# Altium PCB PC110-itx.PcbDoc (part 7 of 16)
Units mm, origin at the board's own origin, x right, y up, seen from the top; angles counter-clockwise.
Board outline 170 x 170 mm, 16 copper layers (FC1, FC2, FC3, FC4, IP1, IC1, IC2, IP2, IP3, IC3, IC4, IP4, BC4, BC3, BC2, BC1), stack 3.903 mm thick; 935 components, 1357 nets, 4698 pads, 3240 vias.
Unrouted connection lines stored in the file: 552.
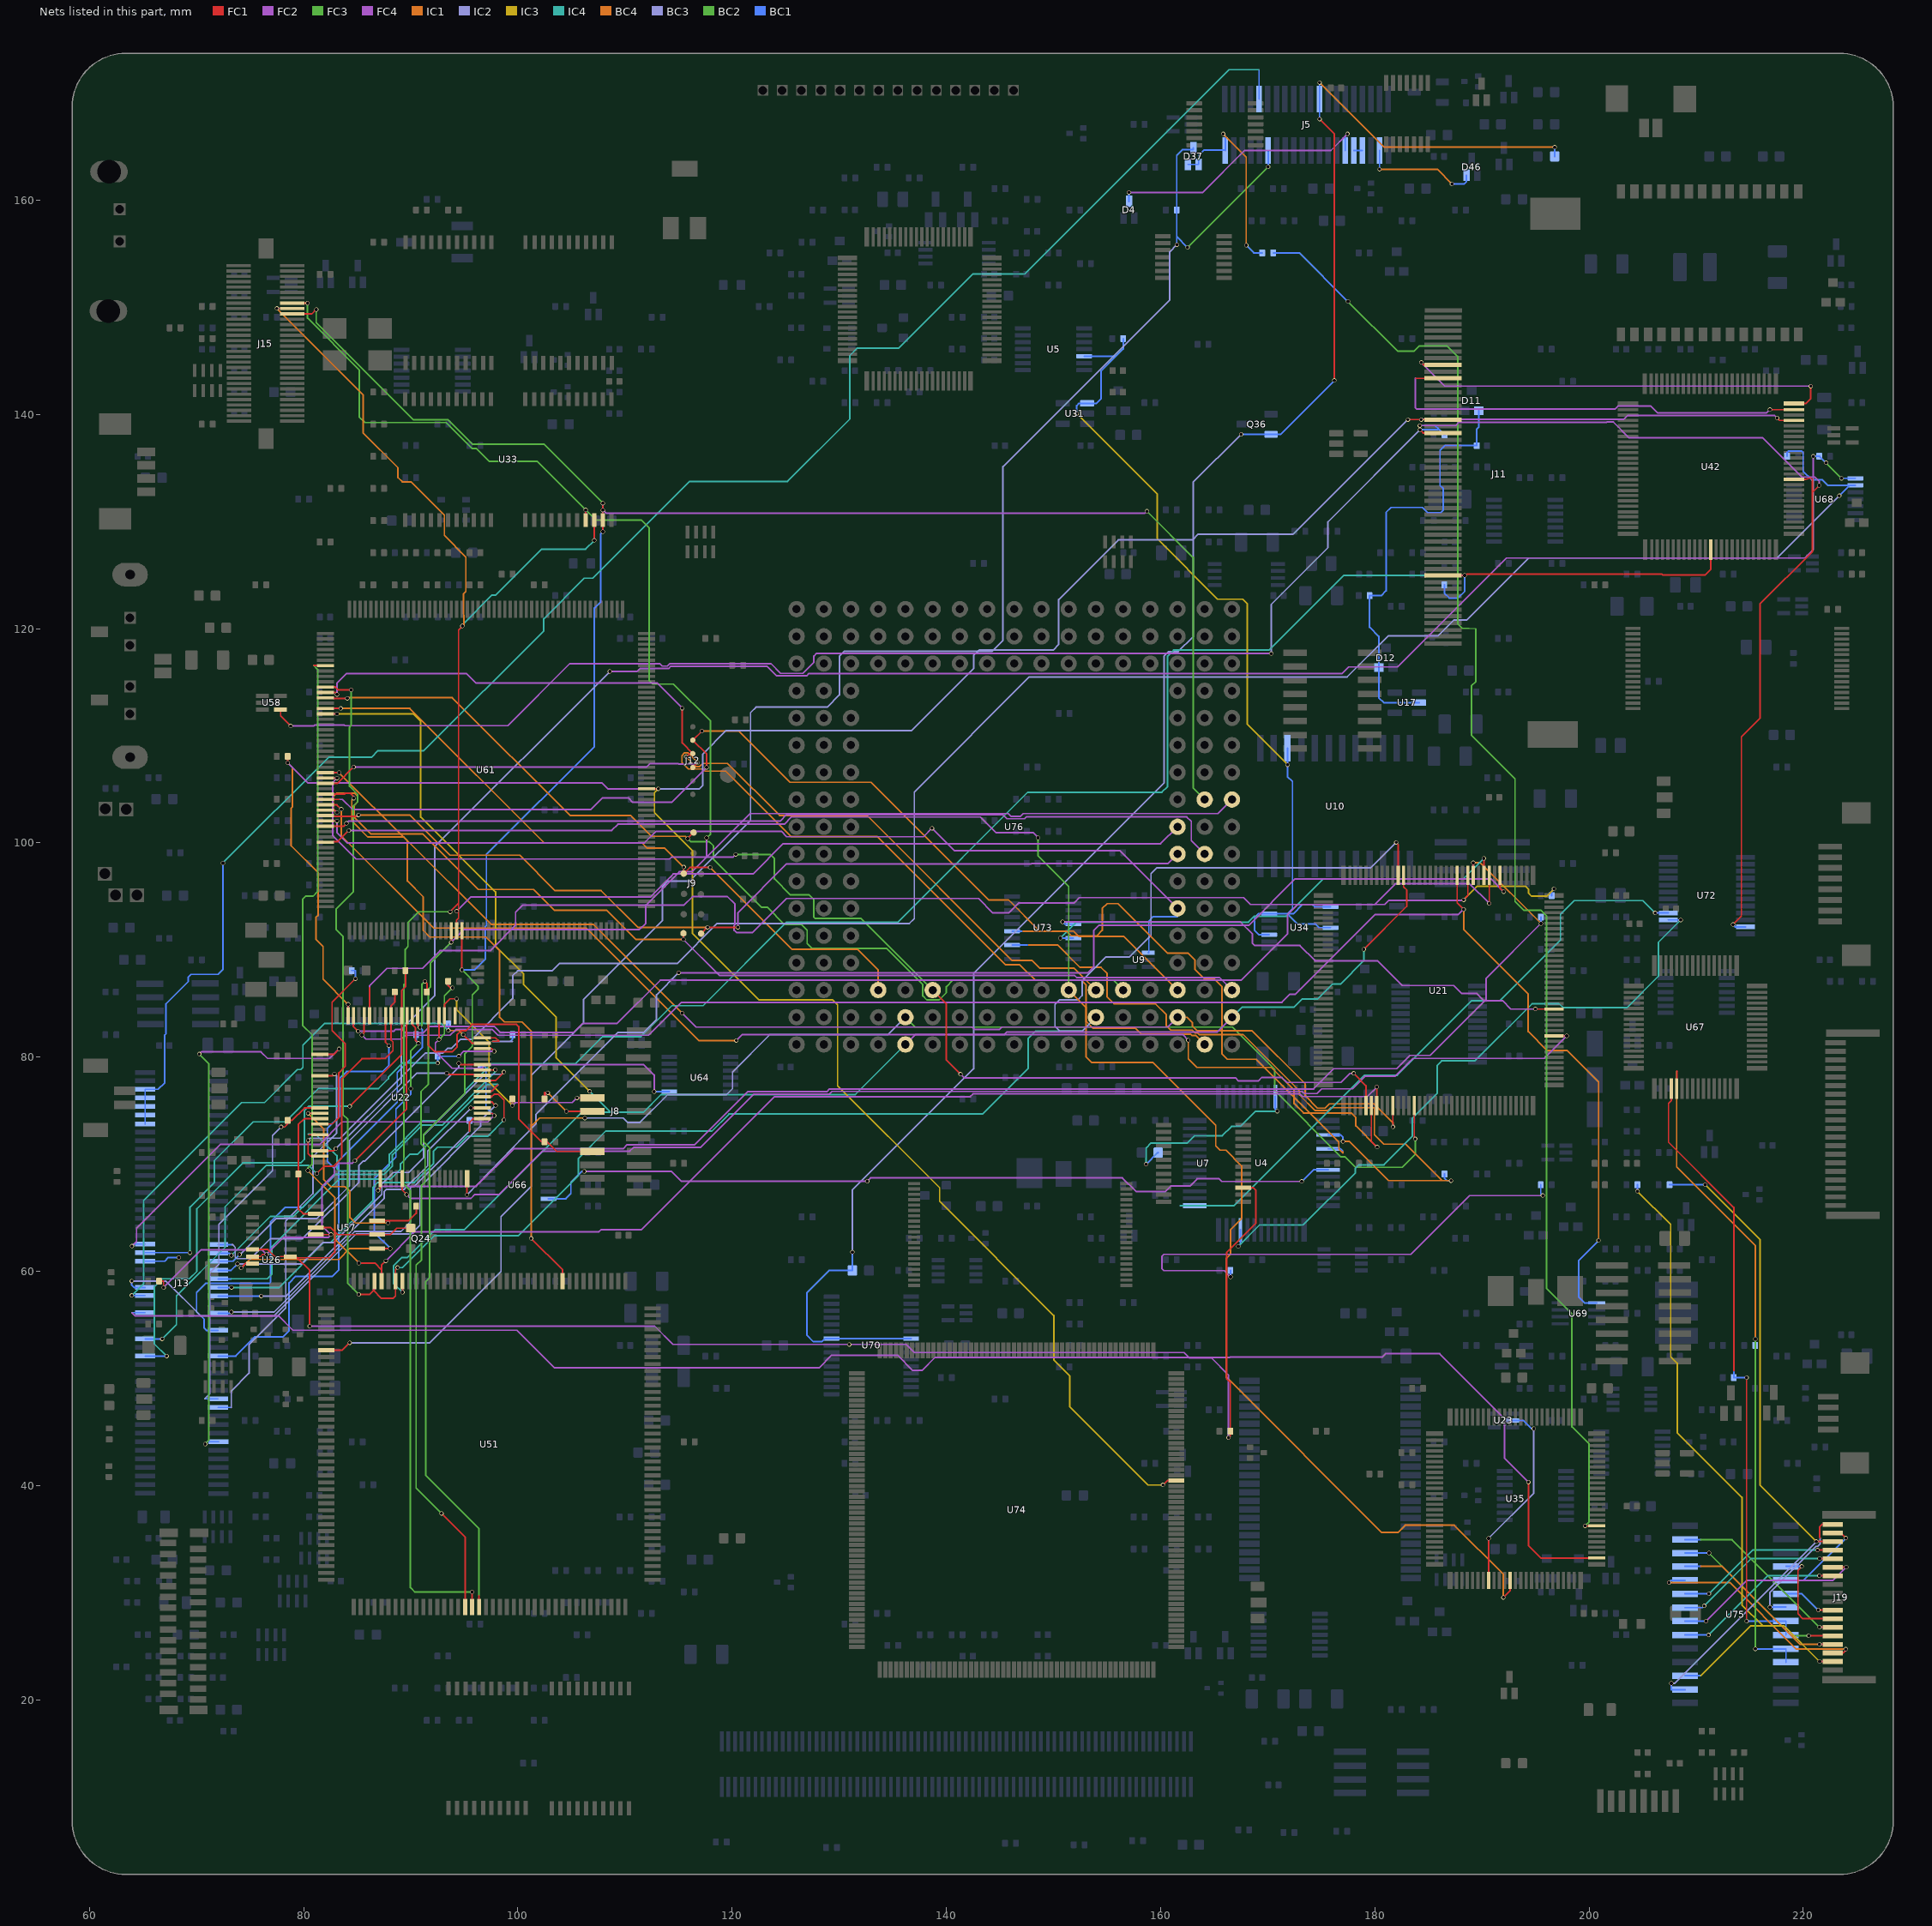
[diagram p20: the nets of this part, all layers, seen from the top]

## Via types
v1: diameter 0.4, hole 0.3, FC1 to BC1, 3240 vias

## Nets (pads, with @x,y where several pads share a name; then routed paths per layer and width w, separated by ;. In a path a pad name is that pad's centre, name@x,y a point inside that pad or via, vN(x,y) a via of type N, cw(c..) or ccw(c..) an arc to the next point about the centre after c; other vN are vias at no path point) (continued)
CPU_D29: J15.38 U33.41 U51.97 U61.176 U76.A8 | length 227
  FC1 w0.15: J15.38@78.928,150.392 v1(80.366,150.393) v1(80.366,150.393) ; v1(92.862,37.414) 95.075,35.202 U51.97@95.075,28.66 ; v1(93.778,90.73) U61.176@93.778,91.807 ; U33.41@106.338,130.148 v1(106.338,131.089)
  FC3 w0.15: v1(92.862,37.414) 90.5,39.776 90.5,60.579 91.008,61.087 91.008,68.047 91.338,68.377 91.338,71.525 90.957,71.907 90.957,76.783 91.643,77.47 91.643,86.385 91.845,86.587 91.845,88.797 v1(93.778,90.73) ; v1(106.338,131.089) 107.277,130.15 111.531,130.15 112.243,129.438 112.243,115.189 112.598,114.833 114.529,114.833 117.982,111.38 117.982,100.837 v1(117.627,100.482)
  FC4 w0.15: v1(93.778,90.73) 94.971,91.923 111.354,91.923 111.938,92.507 111.938,94.183 115.062,97.307 116.23,97.307 117.627,98.704 ; v1(117.627,100.482) 117.627,98.704 ; U76.A8@166.663,104.047 165.358,102.743 147.194,102.743 146.939,102.488 146.025,102.488 145.77,102.743 121.666,102.743 117.627,98.704
  BC2 w0.15: v1(80.366,150.393) 80.366,148.996 85.192,144.17 85.192,139.776 85.725,139.243 93.294,139.243 95.702,136.835 96.119,136.835 97.318,135.636 101.791,135.636 v1(106.338,131.089)
CPU_D30: J15.39 U33.42 U51.98 U61.177 U76.C9 | length 231.4
  FC1 w0.15: v1(77.495,149.893) J15.39@78.928,149.893 ; v1(93.676,93.574) 94.463,94.361 ; U61.177@94.278,91.807 94.278,92.786 94.463,92.971 94.463,93.807 ; v1(94.278,93.622) 94.463,93.807 ; v1(94.818,120.244) 94.463,119.889 94.463,94.361 ; U51.98@95.725,28.66 v1(95.725,30.074) ; v1(107.138,128.245) U33.42@107.138,130.148 ; 94.463,93.807 94.463,94.361
  FC2 w0.15: v1(94.278,93.622) 95.601,94.945 112.344,94.945 114.503,97.104 121.945,97.104 124.765,99.924 159.999,99.924 U76.C9@161.583,101.507
  FC3 w0.15: v1(93.676,93.574) 90.754,93.574 89.737,92.557 89.737,90.322 89.481,90.066 89.481,86.905 89.37,86.793 89.37,70.675 89.338,70.643 89.338,68.148 89.967,67.519 89.967,30.48 90.373,30.074 v1(95.725,30.074)
  IC1 w0.15: v1(77.495,149.893) 85.547,141.841 85.547,138.278 88.798,135.026 88.798,134.112 89.205,133.706 90.018,133.706 93.142,130.581 93.142,128.702 95.148,126.695 95.148,123.469 94.92,123.241 94.92,122.225 94.962,120.387 v1(94.818,120.244) v1@94.818,120.368
  IC4 w0.15: v1@94.818,120.368 97.587,123.137 97.943,123.137 102.238,127.432 106.325,127.432 v1(107.138,128.245)
CPU_D31: J15.40 U33.43 U51.99 U61.178 U76.B8 | length 235.5
  FC1 w0.15: J15.40@78.928,149.392 80.772,149.392 v1(81.178,149.799) ; v1(94.778,88.155) U61.178@94.778,91.807 ; U51.99@96.375,28.66 96.375,29.711 ; v1(107.938,129.057) U33.43@107.938,130.148 v1(107.938,131.078) v1(107.938,131.711)
  FC3 w0.15: v1(94.778,88.155) 96.281,86.652 96.281,86.348 95.749,85.815 95.749,80.991 95.029,80.272 95.029,76.606 91.187,72.764 91.187,72.137 91.758,71.565 91.758,59.399 91.415,59.055 91.415,40.945 96.368,35.992 96.368,29.718 96.375,29.711 ; v1(158.725,130.962) 163.038,126.649 163.038,105.132 U76.B8@164.123,104.047
  FC4 w0.15: v1(107.938,131.078) 108.23,130.785 158.547,130.785 v1(158.725,130.962)
  BC2 w0.15: v1(81.178,149.799) 81.178,148.58 90.261,139.497 93.497,139.497 95.758,137.236 102.413,137.236 v1(107.938,131.711)
  BC1 w0.15: v1(94.778,88.155) 95.978,88.155 96.977,89.154 96.977,92.213 97.066,92.302 97.066,98.92 107.137,108.991 107.137,121.92 107.747,122.53 107.747,128.867 v1(107.938,129.057)
CPU_DC#: U21.41 U61.132 U76.M15 | length 121.1
  FC1 w0.15: U61.132@82.028,106.057 v1(83.109,106.057) ; U76.M15@138.723,86.267 140.005,84.985 140.005,79.731 v1(141.326,78.41) ; v1(178.029,78.486) 179.172,77.343 U21.41@179.172,75.491
  FC2 w0.15: v1(83.109,106.057) 82.728,105.676 82.728,100.66 84.886,98.501 114.173,98.501 114.351,98.679 120.091,98.679 v1(120.345,98.933) ; v1(141.326,78.41) 141.656,78.08 166.98,78.08 167.284,77.775 169.113,77.775 169.443,78.105 171.323,78.105 171.78,77.648 176.851,77.648 177.689,78.486 v1(178.029,78.486)
  BC2 w0.15: v1(120.345,98.933) 123.546,98.933 123.952,98.527 123.952,96.647 125.451,95.148 127.203,95.148 127.635,94.717 127.635,93.066 127.755,92.946 132.044,92.946 U76.M15@138.723,86.267
CPU_EADS#: J12.4 U61.133 U76.B17 | length 100.6
  FC1 w0.15: U61.133@82.028,105.557 83.129,105.557 v1(84.658,107.086) ; J12.4@116.332,107.041 v1@116.784,107.493
  FC2 w0.15: v1(84.658,107.086) 112.039,107.086 112.37,107.417 114.969,107.417 115.036,107.35 116.646,107.35 v1(116.789,107.493)
  BC4 w0.15: v1@116.784,107.493 v1(116.789,107.493) 115.875,108.407 115.561,108.407 115.316,108.163 115.316,107.499 115.908,106.907 117.272,106.907 117.474,106.705 119.405,106.705 125.52,100.59 133.553,100.59 145.523,88.621 146.863,88.621 148.285,87.198 152.578,87.198 153.045,86.731 153.045,83.348 153.691,82.702 157.658,82.702 158.217,82.144 162.817,82.144 162.947,82.014 163.296,82.014 U76.B17@164.123,81.187
CPU_FLUSH#: J12.2 U61.136 U76.C15 | length 96.6
  FC1 w0.15: U61.136@82.028,104.057 83.305,104.057 ; v1(117.178,110.437) J12.2@116.332,109.591 117.627,108.296 v1(117.627,107.061)
  FC4 w0.15: 83.305,104.057 83.624,104.057 84.557,103.124 106.832,103.124 107.925,104.216 110.312,104.216 110.733,103.796 114.362,103.796 v1(117.627,107.061)
  BC4 w0.15: v1(117.178,110.437) 120.622,110.437 125.395,105.664 132.969,105.664 143.942,94.691 145.797,94.691 148.717,91.77 151.867,91.77 152.374,91.263 156.587,91.263 U76.C15@161.583,86.267
CPU_HLDA: J9.4 U61.119 U76.P15 | length 64.4
  FC1 w0.15: U61.119@82.028,112.557 v1(83.464,112.557) ; v1(115.482,97.739) J9.4@115.482,97.139 116.057,97.714 v1(117.958,97.714)
  BC4 w0.15: v1(83.464,112.557) 89.906,112.557 102.465,99.999 111.609,99.999 112.093,99.514 113.707,99.514 v1(115.482,97.739) ; v1(117.958,97.714) 125.603,90.068 131.721,90.068 133.643,88.147 U76.P15@133.643,86.267
CPU_HOLD: J9.1 U61.117 U76.E15 | length 90.6
  FC1 w0.15: U61.117@82.028,113.557 82.753,113.557 82.753,113.499 v1(84.067,113.499) ; v1(115.848,100.405) J9.1@116.407,100.964
  BC2 w0.15: v1(115.848,100.405) 116.129,100.125 117.856,100.125 118.262,99.718 118.262,98.476 122.733,94.005 123.266,94.005 124.892,92.38 126.467,92.38 127,91.846 127,90.627 127.483,90.145 134.442,90.145 137.805,86.781 137.805,85.721 138.176,85.35 139.325,85.35 140.005,86.03 140.005,86.589 140.614,87.198 155.572,87.198 U76.E15@156.503,86.267
  BC4 w0.15: v1(84.067,113.499) 84.131,113.563 93.878,113.563 104.877,102.565 110.515,102.565 112.465,100.615 115.638,100.615 v1(115.848,100.405)
CPU_INTR: U21.133 U61.137 U76.A16 | length 120.3
  FC1 w0.15: U61.137@82.028,103.557 83.108,103.557 v1(83.515,103.149) ; v1(178.968,90.068) 182.982,94.082 182.982,95.606 182.682,95.905 U21.133@182.682,96.966
  IC4 w0.15: U76.A16@166.663,83.727 167.619,84.684 172.466,84.684 173.203,85.42 174.65,85.42 176.047,86.817 176.784,86.817 178.968,89.002 v1(178.968,90.068)
  FC4 w0.15: v1(120.396,81.559) 120.957,82.12 145.41,82.12 145.624,82.335 165.27,82.335 U76.A16@166.663,83.727
  BC4 w0.15: v1(83.515,103.149) 83.515,100.66 92.126,92.05 106.393,92.05 116.883,81.559 v1(120.396,81.559)
CPU_KEN#: J12.3 U61.116 U76.F15 | length 89.1
  FC1 w0.15: U61.116@82.028,114.057 82.92,114.057 v1(83.109,113.868) ; v1(115.341,112.581) 115.341,109.332 J12.3@116.332,108.341 116.027,108.341 v1(115.711,108.025)
  FC2 w0.15: v1(83.109,113.868) 83.109,114.91 84.023,115.823 95.18,115.823 96.069,114.935 112.988,114.935 v1(115.341,112.581)
  BC4 w0.15: v1(115.711,108.025) 116.599,107.137 116.971,107.137 117.26,107.426 119.574,107.426 124.435,102.565 132.588,102.565 146.134,89.019 148.004,89.019 148.707,88.316 151.914,88.316 U76.F15@153.963,86.267
CPU_LDEV#: U21.43 U51.36 U61.111 | length 166.1
  FC1 w0.15: 80.953,116.557 U61.111@82.028,116.557 ; v1(85.166,60.782) 86.64,60.782 87.275,60.147 ; U51.36@87.275,59.1 87.275,60.147 ; v1(87.681,60.993) 87.275,60.587 87.275,60.147 ; U21.43@180.188,75.491 v1(180.188,77.216)
  FC3 w0.15: v1(80.391,69.418) 80.391,69.626 80.797,70.032 80.797,82.067 79.908,82.956 79.908,94.742 80.188,95.021 80.874,95.021 81.305,95.453 81.305,116.205 80.953,116.557
  IC1 w0.15: v1(80.391,69.418) 82.905,66.904 82.905,63.043 v1(85.166,60.782)
  FC4 w0.15: v1(87.681,60.993) 90.389,63.701 107.569,63.701 107.749,63.881 111.53,63.881 123.959,76.31 142.223,76.31 142.489,76.576 172.984,76.576 173.232,76.328 179.299,76.328 v1(180.188,77.216)
CPU_MIO#: U21.50 U51.10 U61.131 U76.N16 | length 161.5
  FC1 w0.15: U61.131@82.028,106.557 v1(83.312,106.557) ; v1(101.233,63.079) 104.175,60.138 U51.10@104.175,59.1 ; U21.50@183.682,75.491 183.682,72.452 v1(183.769,72.365)
  IC1 w0.15: v1(83.312,106.557) 89.687,100.182 89.687,96.444 91.161,94.971 91.161,91.846 91.796,91.211 97.027,91.211 98.298,89.941 98.298,83.718 98.73,83.287 100.381,83.287 101.233,82.434 101.233,73.522 ; v1(101.233,63.079) 101.233,73.522 ; v1(106.248,74.32) 102.032,74.32 101.233,73.522
  IC2 w0.15: v1(106.248,74.32) 109.83,74.32 110.236,73.914 111.404,73.914 113.995,76.505 119.482,76.505 120.04,77.064 120.04,78.613 123.542,82.114 134.569,82.114 U76.N16@136.183,83.727
  BC2 w0.15: U76.N16@136.183,83.727 137.1,82.81 166.694,82.81 170.658,78.847 170.658,76.869 176.838,70.689 177.241,70.689 178.206,69.723 182.575,69.723 183.769,70.917 v1(183.769,72.365)
CPU_NMI: J9.10 U61.138 U76.A15 | length 96.6
  FC1 w0.15: U61.138@82.028,103.057 82.896,103.057 v1(83.109,102.845) ; v1(115.457,90.984) J9.10@115.457,91.564
  FC2 w0.15: v1(115.457,90.984) 118.796,87.645 151.957,87.645 152.172,87.43 165.5,87.43 U76.A15@166.663,86.267
  BC4 w0.15: v1(83.109,102.845) 82.754,103.2 82.754,104.292 83.109,104.647 84.734,104.647 85.038,104.343 85.038,103.822 84.734,103.518 84.734,102.389 86.285,100.838 91.135,100.838 96.317,95.656 101.473,95.656 103.403,93.726 108.28,93.726 111.022,90.984 v1(115.457,90.984)
CPU_RDY#: U21.134 U51.34 U51.37 U61.115 U76.F16 | length 199
  FC1 w0.15: U61.115@82.028,114.557 82.95,114.557 83.211,114.296 v1(84.429,114.296) ; v1(85.141,57.861) 86.168,57.861 86.523,58.217 ; v1(88.778,60.356) 88.575,60.152 U51.34@88.575,59.1 88.575,57.709 88.372,57.506 87.235,57.506 86.523,58.217 ; v1(181.991,100.051) 182.182,99.86 U21.134@182.182,96.966 ; 86.523,58.217 86.625,58.318 U51.37@86.625,59.1 86.523,58.217
  FC3 w0.15: v1(84.429,114.296) 84.429,110.948 84.283,110.802 84.283,105.287 85.038,104.532 85.038,103.822 84.632,103.415 84.632,95.428 83.033,93.83 83.033,91.923 83.668,91.288 83.668,74.65 84.125,74.193 84.125,58.877 v1(85.141,57.861)
  IC2 w0.15: U76.F16@153.963,83.727 152.683,82.448 150.597,82.448 150.139,82.906 150.139,84.938 150.546,85.344 152.273,85.344 152.679,85.75 152.679,87.147 154.889,89.357 157.099,89.357 159.106,91.364 159.106,97.13 159.664,97.688 179.629,97.688 v1(181.991,100.051)
  IC4 w0.15: v1(88.778,60.356) 89.237,60.356 92.229,63.348 100.051,63.348 105.639,68.936 105.639,70.536 108.204,73.101 118.11,73.101 119.71,74.701 143.383,74.701 147.625,78.943 147.625,81.737 148.336,82.448 152.683,82.448 U76.F16@153.963,83.727
CPU_RESET: U21.46 U61.135 U76.C16 | length 118.5
  FC1 w0.15: U61.135@82.028,104.557 83.806,104.557 83.896,104.647 84.328,104.647 84.683,104.292 v1(84.683,104.177) ; U21.46@181.682,75.491 181.682,73.486 v1(181.686,73.482)
  FC4 w0.15: v1(115.341,84.099) 116.637,82.804 142.432,82.804 142.655,82.58 144.95,82.58 145.173,82.804 160.659,82.804 U76.C16@161.583,83.727
  BC4 w0.15: v1(84.683,104.177) 84.492,103.986 84.492,102.05 85.983,100.559 89.357,100.559 97.536,92.38 107.061,92.38 v1(115.341,84.099) ; U76.C16@161.583,83.727 162.475,83.727 162.975,83.227 162.975,82.906 163.407,82.474 168.529,82.474 173.499,77.504 173.499,76.4 174.651,75.248 175.361,75.248 175.754,75.641 179.934,75.641 181.686,73.889 v1(181.686,73.482)
CPU_SMI#: U61.141 U76.B10 | length 85.3
  FC1 w0.15: U61.141@82.028,101.557 83.718,101.557 v1(83.99,101.829)
  FC2 w0.15: v1(83.99,101.829) 84.193,102.032 124.473,102.032 125.096,102.655 145.27,102.655 145.667,102.258 147.297,102.258 147.473,102.434 162.437,102.434 162.865,102.006 162.865,100.225 U76.B10@164.123,98.967
CPU_SMIACT#: U9.1 U61.140 U76.C12 | length 91.8
  FC1 w0.15: U61.140@82.028,102.057 v1(83.109,102.057)
  FC2 w0.15: v1(83.109,102.057) 83.109,100.965 84.075,99.999 111.81,99.999 112.903,101.092 124.587,101.092 125.095,100.584 137.871,100.584 v1(138.659,101.371)
  FC4 w0.15: v1(138.659,101.371) 140.741,99.289 156.181,99.289 U76.C12@161.583,93.887
  BC1 w0.15: U9.1@158.85,89.74 158.902,89.74 158.902,92.71 159.309,93.116 161.583,93.116 U76.C12@161.583,93.887
CPU_SRESET: J9.9 U61.139 U76.C10 | length 88.5
  FC1 w0.15: U61.139@82.028,102.557 82.754,102.557 82.754,102.49 85.007,102.49 v1(85.133,102.615) ; J9.9@117.107,91.539 117.694,92.126 v1(117.717,92.126) v1(120.548,92.126)
  FC2 w0.15: v1(120.548,92.126) 120.548,93.497 125.095,98.044 147.929,98.044 147.955,98.07 160.685,98.07 U76.C10@161.583,98.967
  BC4 w0.15: v1(85.133,102.615) 89.917,102.615 93.675,98.857 100.178,98.857 103.48,95.555 107.772,95.555 111.201,92.126 v1(117.717,92.126)
CPU_STPCLK#: U35.62 U61.144 U76.G15 | length 168.9
  FC1 w0.15: U61.144@82.028,100.057 82.753,100.057 82.753,100.127 83.185,100.127 v1(84.226,101.168) ; v1(191.999,29.566) 192.62,30.187 U35.62@192.62,31.15
  FC2 w0.15: v1(84.226,101.168) 108.763,101.168 109.347,101.752 124.866,101.752 125.539,102.425 143.168,102.425 144.628,100.965 148.082,100.965 v1(148.565,100.482)
  FC3 w0.15: v1(148.565,100.482) 148.565,98.781 151.423,95.923 U76.G15@151.423,86.267
  IC1 w0.15: U76.G15@151.423,86.267 153.035,84.655 153.035,80.061 153.594,79.502 159.309,79.502 165.151,73.66 165.151,71.731 165.558,71.324 166.098,71.324 167.564,69.858 167.564,64.922 166.522,63.881 166.522,61.595 166.141,61.214 166.141,50.14 180.655,35.626 182.148,35.626 182.83,36.308 187.415,36.308 191.999,31.725 v1(191.999,29.566)
CPU_WR#: U21.42 U51.33 U61.120 U76.N17 | length 168.3
  FC1 w0.15: U61.120@82.028,112.057 v1(83.109,112.057) ; v1(89.225,58.055) U51.33@89.225,59.1 ; U21.42@179.68,75.491 179.68,72.136 v1(180.213,71.603)
  FC2 w0.15: U76.N17@136.183,81.187 137.113,82.118 162.052,82.118 v1(162.585,81.585)
  IC3 w0.15: v1(83.109,112.057) 90.229,112.057 90.932,111.354 90.932,102.413 97.923,95.422 97.923,90.367 100.533,87.757 100.533,86.766 103.581,83.718 103.581,79.934 v1(106.705,76.81)
  IC4 w0.15: v1(89.225,58.055) 88.392,58.888 88.392,60.503 89.194,61.305 89.699,61.305 92.301,63.906 95.021,63.906 105.969,74.854 108.661,74.854 ; v1(106.705,76.81) 108.661,74.854 ; U76.N17@136.183,81.187 131.5,76.505 113.36,76.505 111.709,74.854 108.661,74.854
  BC4 w0.15: v1(162.585,81.585) 162.585,79.832 163.373,79.045 170.332,79.045 172.466,76.911 172.466,75.667 173.345,74.788 177.815,74.788 178.232,74.371 178.232,73.584 v1(180.213,71.603)
D4_3: D4.3 J5.35 | length 25.1
  FC4 w0.15: v1(157.05,160.733) 163.933,160.733 167.843,164.643 175.896,164.643 v1(177.444,166.191)
  BC1 w0.15: D4.3@157.05,159.89 v1(157.05,160.733) ; J5.35@177.24,164.65 177.24,165.987 v1(177.444,166.191)
D11_2: C62.2 D11.3 D12.1 R88.1 U17.2 | length 41.4
  BC1 w0.15: U17.2@184.138,113.09 180.848,113.09 180.375,113.563 D12.1@180.375,116.365 180.375,119.278 179.51,120.143 R88.1@179.51,123.09 180.596,123.09 181.051,123.546 181.051,130.861 181.508,131.318 184.455,131.318 184.937,130.835 186.157,130.835 186.385,131.064 186.385,133.071 186.08,133.375 186.08,136.633 186.538,137.09 C62.2@189.52,137.09 189.52,138.633 189.7,138.813 D11.3@189.7,140.365
D18_2_3: D37.1 D37.2 J5.21 R397.2 | length 19.2
  IC1 w0.15: v1(165.837,166.192) 167.996,164.033 v1(167.996,155.801)
  BC1 w0.15: D37.1@162.55,163.34 D37.2@163.55,163.34 163.55,164.186 164.033,164.668 J5.21@166.04,164.668 ; v1(165.837,166.192) 166.04,165.989 J5.21@166.04,164.668 ; J5.21@166.04,164.65 J5.21@166.04,164.668 ; v1(167.996,155.801) 168.707,155.09 R397.2@169.49,155.09
D28_1: C221.2 D50.1 J5.12 Q36.2 U70.7 U70.24 | length 177.3
  FC1 w0.15: v1(174.84,167.578) 176.225,166.193 v1(176.225,143.169)
  BC4 w0.15: v1(174.84,170.98) 180.872,164.948 v1(196.788,164.948)
  BC3 w0.15: v1(131.225,61.798) 131.225,67.598 142.545,78.918 142.545,87.808 160.325,105.588 160.325,117.45 160.731,117.856 161.646,117.856 163.038,119.249 163.038,133.665 v1(167.513,138.14)
  BC1 w0.15: v1(131.225,61.798) C221.2@131.225,60.09 129.057,60.09 126.975,58.007 126.975,54.051 127.584,53.442 128.372,53.442 128.67,53.74 U70.24@129.288,53.74 U70.7@136.713,53.74 ; v1(167.513,138.14) Q36.2@170.31,138.14 171.196,138.14 v1(176.225,143.169) ; v1(174.84,167.578) J5.12@174.84,169.45 v1(174.84,170.98) ; D50.1@196.788,164.09 v1(196.788,164.948)
D46_1: D46.1 J5.39 | length 11.1
  BC4 w0.15: v1(180.44,162.892) 185.825,162.892 v1(187.198,161.519)
  BC1 w0.15: v1(180.44,162.892) J5.39@180.44,164.65 ; v1(187.198,161.519) 188.321,161.519 188.55,161.747 D46.1@188.55,162.34
D171_GPCLK: R198.1 U67.20 U75.22 U75.23 | length 58.5
  FC1 w0.15: U67.20@207.685,77.058 207.685,75.946 207.416,75.677 207.416,72.06 213.512,65.964 213.512,50.724 213.51,50.721 ; v1(214.706,27.36) v1(214.706,50.09)
  BC1 w0.15: 213.51,50.721 R198.1@213.51,50.09 v1(214.706,50.09) ; v1(214.706,27.36) U75.22@218.38,27.36 U75.23@218.38,26.06
D171_GPDATA: R203.1 U67.21 U75.24 U75.25 | length 63.4
  FC1 w0.15: U67.21@208.185,77.058 208.185,78.708
  FC3 w0.15: v1@215.51,53.687 v1(215.519,53.696) v1(215.519,24.76)
  IC1 w0.15: 208.185,78.708 208.178,78.715 208.178,69.774 215.519,62.433 v1(215.519,53.696)
  BC1 w0.15: R203.1@215.51,53.09 v1@215.51,53.687 ; v1(215.519,24.76) U75.24@218.38,24.76 U75.25@218.38,23.51
D171_P0A0: J19.6 U75.13 | length 17.2
  FC1 w0.15: v1(221.513,26.785) J19.6@222.758,26.785
  BC2 w0.15: 210.429,34.96 210.439,34.95 213.348,34.95 v1(221.513,26.785)
  BC1 w0.15: U75.13@208.955,34.96 210.429,34.96
D171_P0A1: J19.5 U75.12 | length 17
  FC1 w0.15: v1(220.497,25.985) J19.5@222.758,25.985
  BC2 w0.15: v1(211.201,33.71) 218.926,25.985 v1(220.497,25.985)
  BC1 w0.15: U75.12@208.955,33.71 v1(211.201,33.71)
D171_P0A2: J19.4 U75.11 | length 16.8
  FC1 w0.15: v1(221.513,25.185) J19.4@222.758,25.185
  BC4 w0.15: 210.438,32.46 210.439,32.461 212.42,32.461 219.696,25.185 v1(221.513,25.185)
  BC1 w0.15: U75.11@208.955,32.46 210.438,32.46
D171_P0A3: J19.3 U75.10 | length 22.1
  FC1 w0.15: J19.3@222.758,24.385 223.723,24.385 223.977,24.639 v1(223.977,24.74)
  BC4 w0.15: v1(207.467,30.963) 213.131,30.963 219.354,24.74 v1(223.977,24.74)
  BC1 w0.15: v1(207.467,30.963) 207.665,31.16 U75.10@208.955,31.16
D171_P0B0: J19.15 U75.9 | length 15.5
  FC1 w0.15: v1(221.336,33.985) J19.15@222.758,33.985
  IC4 w0.15: v1(211.19,29.91) 215.265,33.985 v1(221.336,33.985)
  BC1 w0.15: U75.9@208.955,29.91 v1(211.19,29.91)
D171_P0B1: J19.14 U75.8 | length 15.7
  FC1 w0.15: v1(221.526,33.198) 221.539,33.185 J19.14@222.758,33.185
  IC4 w0.15: v1(210.744,28.778) 215.163,33.198 v1(221.526,33.198)
  BC1 w0.15: U75.8@208.955,28.61 210.576,28.61 v1(210.744,28.778)
D171_P0B2: J19.13 U75.7 | length 18.4
  FC1 w0.15: J19.13@222.758,32.385 v1(224.003,32.385)
  FC4 w0.15: v1(210.926,27.36) 214.732,31.166 222.783,31.166 v1(224.003,32.385)
  BC1 w0.15: U75.7@208.955,27.36 v1(210.926,27.36)
D171_P0B3: J19.12 U75.6 | length 16.1
  FC1 w0.15: v1(221.501,31.585) J19.12@222.758,31.585
  IC4 w0.15: v1(211.15,26.06) 216.675,31.585 v1(221.501,31.585)
  BC1 w0.15: U75.6@208.955,26.06 v1(211.15,26.06)
D171_P0C2: J19.2 R205.1 U75.3 | length 63.1
  FC1 w0.15: v1(221.528,23.585) J19.2@222.758,23.585
  IC3 w0.15: v1(204.51,67.488) 207.62,64.378 207.62,52.045 208.229,51.435 208.229,44.958 214.274,38.913 214.274,28.854 216.205,26.924 ; 210.423,22.26 215.087,26.924 216.205,26.924 ; v1(221.528,23.585) 218.189,26.924 216.205,26.924
  BC1 w0.15: v1(204.51,67.488) R205.1@204.51,68.09 ; U75.3@208.955,22.26 210.423,22.26
D171_P0C3: J19.16 R201.1 U75.2 | length 63.4
  FC1 w0.15: v1(221.209,34.785) J19.16@222.758,34.785
  IC2 w0.15: v1(207.67,21.539) 207.963,21.539 v1(221.209,34.785)
  IC3 w0.15: v1(210.845,68.09) 215.976,62.959 215.976,40.017 v1(221.209,34.785)
  BC1 w0.15: R201.1@207.51,68.09 v1(210.845,68.09) ; v1(207.67,21.539) 207.67,20.96 U75.2@208.955,20.96
D171_P1A0: J19.18 U75.21 | length 12.4
  FC1 w0.15: 221.564,35.128 221.539,35.154 221.539,36.17 221.754,36.385 J19.18@222.758,36.385
  IC2 w0.15: v1(216.891,28.66) 216.891,30.048 221.183,34.341 221.361,34.341 221.564,34.544 221.564,35.128
  BC1 w0.15: v1(216.891,28.66) U75.21@218.38,28.66
D171_P1A1: J19.8 U75.20 | length 5
  FC1 w0.15: v1(221.387,28.385) J19.8@222.758,28.385
  BC1 w0.15: U75.20@218.38,29.91 219.862,29.91 v1(221.387,28.385)
D171_P1A2: J19.17 U75.19 | length 8.6
  FC1 w0.15: J19.17@222.758,35.585 223.495,35.585 v1(223.977,35.102)
  BC1 w0.15: U75.19@218.38,31.16 220.035,31.16 v1(223.977,35.102)
D171_P1A3: J19.7 U75.18 | length 9.5
  FC1 w0.15: v1(219.862,32.461) 219.507,32.106 219.507,28.042 219.963,27.585 J19.7@222.758,27.585
  BC1 w0.15: U75.18@218.38,32.46 v1(219.862,32.461) v1(219.862,32.461)
Dock_PWR_IN-: J5.5 J5.36 J5.37 J13.53 J13.54 J13.55 J13.56 J13.57 | length 164.6
  IC4 w0.15: v1(72.466,98.12) 82.345,107.999 86.327,107.999 86.937,108.609 91.215,108.609 102.413,119.807 102.413,120.93 106.197,124.714 106.985,124.714 116.027,133.756 125.171,133.756 130.988,139.573 130.988,145.491 131.698,146.202 135.559,146.202 142.469,153.111 147.298,153.111 166.373,172.187 169.189,172.187
  BC1 w0.15: J13.57@65.207,73.753 J13.56@65.207,74.602 J13.55@65.207,75.402 J13.54@65.207,76.202 J13.53@65.207,77.002 66.411,77.002 67.031,77.622 67.031,82.067 67.158,82.194 67.158,84.988 69.24,87.071 69.24,87.478 69.494,87.732 72.009,87.732 72.466,88.189 v1(72.466,98.12) ; J5.5@169.19,169.45 169.19,172.186 ; J5.36@178.04,164.65 J5.37@178.84,164.65
EN_LCD_VAA: R397.1 U35.83 | length 139.1
  FC1 w0.15: v1(199.623,36.25) U35.83@200.72,36.25
  FC3 w0.15: v1(177.495,150.546) 182.143,145.898 183.643,145.898 184.125,146.38 186.766,146.38 187.731,145.415 187.731,120.472 188.163,120.04 189.433,119.996 189.433,115.087 189.015,114.669 189.015,110.065 193.091,105.989 193.091,94.538 193.904,93.726 195.478,93.726 196.037,93.168 196.037,58.395 198.399,56.032 198.399,45.491 200,43.891 200,36.627 v1(199.623,36.25)
  BC1 w0.15: R397.1@170.51,155.09 172.951,155.09 v1(177.495,150.546)
EN_RS232: J13.79 U35.77 | length 155.4
  FC1 w0.15: v1(194.335,40.335) 194.335,34.408 195.493,33.25 U35.77@200.72,33.25
  FC2 w0.15: 63.964,56.152 64.262,55.855 77.647,55.855 78.994,54.508 99.924,54.508 103.429,51.003 128.118,51.003 129.285,52.171 135.433,52.171 136.851,50.754 137.723,50.754 138.938,51.968 166.47,51.968 166.496,51.995 180.671,51.995 181,52.324 186.055,52.324 192.1,46.279 192.1,42.57 v1(194.335,40.335)
  BC1 w0.15: 63.964,56.152 J13.79@65.207,56.152
Enable_IRDA_Buf: Q24.1 R242.2 U7.15 U26.1 U26.7 U57.4 U57.10 | length 145.6
  FC1 w0.15: U26.1@75.25,62.04 76.657,62.04 77.307,61.39 U26.7@78.75,61.39 79.275,61.39 79.386,61.279 ; v1(80.569,54.889) 80.569,60.096 79.386,61.279 ; U57.4@81.138,64.09 82.525,64.09 82.905,63.71 ; Q24.1@90,64.04 88.713,64.04 88.113,63.44 U57.10@86.863,63.44 83.175,63.44 82.905,63.71 ; v1(166.345,44.475) 166.51,44.641 R242.2@166.51,45.09 166.51,49.644 166.167,49.987 166.167,61.773 168.885,64.491 168.885,67.586 168.656,67.815 U7.15@167.712,67.815 ; 79.386,61.279 82.399,61.279 82.905,61.784 82.905,63.71
  FC2 w0.15: v1(80.569,54.889) 112.776,54.889 114.478,53.188 v1(130.937,53.188)
  FC4 w0.15: v1(130.937,53.188) 136.267,53.188 137.029,52.426 162.193,52.426 162.687,51.932 164.73,51.932 166.345,50.317 v1(166.345,44.475)
Enable_YMF_Bus: R147.1 U5.5 U10.3 U31.1 U34.1 U34.4 U34.10 U34.13 | length 85.9
  IC3 w0.15: v1(152.171,140.081) 159.69,132.563 159.69,128.397 165.329,122.758 167.665,122.758 168.097,122.326 168.097,111.062 v1(171.856,107.302)
  BC1 w0.15: v1(152.171,140.081) 152.171,140.818 152.394,141.04 U31.1@153.138,141.04 154.026,141.04 154.457,141.472 154.457,144.069 155.829,145.44 ; U5.5@152.862,145.44 155.829,145.44 ; R147.1@156.51,147.09 156.51,146.121 155.829,145.44 ; U34.10@170.137,91.44 169.164,91.44 168.758,91.846 168.758,93.034 169.113,93.39 U34.13@170.137,93.39 171.837,93.39 ; U10.3@171.85,108.84 v1@171.85,107.309 ; v1(171.856,107.302) v1@171.85,107.309 ; U34.4@175.862,92.09 174.803,92.09 174.462,92.431 172.796,92.431 171.837,93.39 ; U34.1@175.862,94.04 174.386,94.04 174.167,94.259 173.254,94.259 172.385,93.39 171.837,93.39 ; 171.837,93.39 172.314,93.867 172.314,105.734 171.85,106.197 171.85,107.302 v1@171.85,107.309
ESS_AEN: U4.40 U72.16 | length 60.6
  IC4 w0.15: 161.825,66.14 161.823,66.142 166.864,66.142 179.031,78.308 182.093,78.308 189.058,85.273 191.674,85.273 197.327,90.926 197.327,93.336 198.606,94.615 205.022,94.615 v1(206.172,93.465)
  BC1 w0.15: 161.825,66.14 U4.40@163.2,66.14 ; v1(206.172,93.465) U72.16@207.4,93.465
ESS_CLK: R70.1 R344.2 | length 47.5
  FC4 w0.15: v1(166.522,59.487) 165.938,60.071 160.325,60.071 160.122,60.274 160.122,61.392 160.325,61.595 183.365,61.595 188.852,67.081 v1(195.682,67.081)
  BC1 w0.15: R70.1@166.51,60.09 166.522,60.09 v1(166.522,59.487) ; R344.2@195.49,68.09 195.49,67.273 v1(195.682,67.081)
ESS_DACK1#: U4.36 U72.15 | length 61.7
  IC4 w0.15: v1(167.247,62.332) 169.253,64.338 173.304,64.338 178.182,69.216 178.182,69.634 178.502,69.954 180.848,69.954 183.494,72.601 183.494,74.3 185.826,76.632 185.826,79.248 186.233,79.654 189.342,79.654 194.676,84.988 197.205,84.988 197.557,84.636 203.559,84.636 206.477,87.554 206.477,90.729 v1(208.559,92.812)
  BC1 w0.15: v1(167.247,62.332) 167.45,62.535 U4.36@167.45,63.89 ; U72.15@207.4,92.815 208.556,92.815 v1(208.559,92.812)
ESS_DRDY: U4.21 U66.6 | length 76.5
  FC2 w0.15: v1(106.197,69.342) 114.33,69.342 115.244,68.428 v1(132.613,68.428)
  FC4 w0.15: v1(132.613,68.428) 132.918,68.732 156.439,68.732 157.704,67.467 160.457,67.467 160.96,67.97 162.737,67.97 163.424,68.656 165.456,68.656 165.712,68.4 v1(173.184,68.4)
  BC1 w0.15: U66.6@102.862,66.79 104.484,66.79 104.953,67.26 104.953,68.301 105.994,69.342 v1(106.197,69.342) ; v1(173.184,68.4) 174.274,69.49 U4.21@175.65,69.49
ESS_IRQ1: R29.1 U4.16 U73.13 | length 67.6
  BC4 w0.15: 147.666,90.465 150.403,90.465 152.476,88.392 154.432,88.392 155.016,87.808 155.016,85.623 155.651,84.988 159.512,84.988 160.528,83.972 160.528,82.931 160.934,82.525 162.966,82.525 163.247,82.244 163.476,82.244 163.601,82.118 167.691,82.118 172.974,76.835 172.974,76.465 174.421,75.018 175.591,75.018 175.859,75.286 179.934,75.286 179.959,75.26 179.959,72.746 180.823,71.882 182.88,71.882 186.284,68.478 ; v1(177.03,72.13) 177.64,72.13 181.292,68.478 186.284,68.478 ; v1(187.122,68.478) 186.284,68.478
  BC1 w0.15: U73.13@146.137,90.465 147.666,90.465 ; U4.16@175.65,72.74 176.827,72.74 177.03,72.537 v1(177.03,72.13) ; R29.1@186.51,69.09 186.51,68.684 186.715,68.478 v1(187.122,68.478)
ESS_IRQ1_Buf: U21.118 U73.7 | length 45.4
  FC1 w0.15: v1(190.17,98.552) 190.182,98.54 U21.118@190.182,96.966
  IC4 w0.15: v1(150.647,91.115) 152.141,92.608 168.199,92.608 168.758,93.167 171.729,93.167 175.209,96.647 188.265,96.647 v1(190.17,98.552)
  BC1 w0.15: v1(150.647,91.115) U73.7@151.862,91.115
ESS_IRQ2: U4.18 U73.15 | length 49.4
  IC1 w0.15: 147.168,91.765 151.237,91.765 151.663,91.338 154.051,91.338 154.559,91.846 154.559,93.878 155.016,94.336 156.018,94.336 160.629,89.725 162.56,89.725 163.195,89.09 163.195,88.214 164.084,87.325 164.998,87.325 165.735,86.589 165.735,80.289 166.218,79.807 168.91,79.807 176.642,72.075 176.642,71.44 177.038,71.044 177.038,71.186
  BC1 w0.15: U73.15@146.137,91.765 147.168,91.765 ; U4.18@175.65,71.44 176.784,71.44 177.038,71.186
ESS_IRQ2_Buf: U21.87 U73.5 | length 50.9
  FC1 w0.15: v1(194.985,84.491) U21.87@196.732,84.491
  FC2 w0.15: v1(150.851,92.634) 167.437,92.634 168.58,91.491 168.58,90.627 168.783,90.424 173.006,90.424 174.428,89.002 180.238,89.002 182.55,86.69 187.35,86.69 188.087,85.954 189.484,85.954 190.164,85.273 191.923,85.273 192.705,84.491 v1(194.985,84.491)
  BC1 w0.15: v1(150.851,92.634) 151.069,92.415 U73.5@151.862,92.415
ESS_Sound: C18.1 U4.9 | length 18.2
  IC4 w0.15: v1(158.648,70.002) 158.648,71.526 159.106,71.984 162.509,71.984 163.195,72.669 165.76,72.669 166.624,73.533 167.437,73.533 168.859,74.955 v1(170.891,74.955)
  BC1 w0.15: v1(158.648,70.002) 159.715,71.069 159.775,71.069 C18.1@159.775,71.09 ; U4.9@170.7,76.34 170.7,75.147 v1(170.891,74.955)
F65_ENAVEE: D37.3 J5.26 R237.1 U51.47 | length 178.4
  FC1 w0.15: U51.47@82.13,52.655 83.618,52.655 v1(84.303,53.34)
  BC2 w0.15: v1(162.515,155.594) v1(170.04,163.119)
  BC3 w0.15: v1(84.303,53.34) 91.77,53.34 98.425,59.995 98.425,65.126 101.27,67.97 101.27,78.334 106.121,83.185 106.121,85.369 113.484,92.733 113.484,95.91 114.015,96.441 116.05,96.441 121.717,102.108 121.717,112.166 122.225,112.674 128.88,112.674 130.023,113.817 130.023,117.45 130.454,117.881 144.247,117.881 145.288,118.923 145.288,135.128 160.858,150.698 160.858,155.194 v1(161.519,155.854)
  BC1 w0.15: v1(161.519,155.854) 161.51,155.863 161.51,156.6 ; v1(162.515,155.594) 161.51,156.6 ; D37.3@163.05,164.89 163.05,164.719 162.043,164.719 161.51,164.186 R237.1@161.51,159.09 161.51,156.6 ; v1(170.04,163.119) J5.26@170.04,164.65
FCS_BVD1: J11.42 U42.50 | length 42.3
  FC1 w0.15: v1(184.333,144.855) 184.565,144.623 J11.42@186.358,144.623 ; U42.50@219.127,141.025 220.229,141.025 220.701,141.497 v1(220.701,142.646)
  FC2 w0.15: v1(184.333,144.855) 186.542,142.646 v1(220.701,142.646)
FCS_BVD2: J11.40 U42.49 | length 41.2
  FC1 w0.15: 183.805,143.372 J11.40@186.358,143.372 ; v1(216.878,140.45) U42.49@219.127,140.45
  FC2 w0.15: 183.805,143.372 183.794,143.383 183.794,140.614 183.896,140.513 202.438,140.513 202.717,140.792 205.74,140.792 206.4,140.132 216.56,140.132 v1(216.878,140.45)
FCS_IOCHRDY: J11.34 R323.2 U22.98 U42.47 U61.23 U74.188 | length 282.1
  FC1 w0.15: v1(78.51,107.49) R323.2@78.51,108.09 ; U22.98@84.15,83.86 v1(84.15,84.938) ; U61.23@112.028,105.057 v1@113.104,105.057 ; v1(160.223,40.063) 160.63,40.469 U74.188@161.458,40.469 ; v1(183.084,139.523) v1(184.327,139.523) J11.34@186.358,139.523 ; v1(217.551,139.675) 217.776,139.45 U42.47@219.127,139.45
  FC2 w0.15: v1(184.327,139.523) 184.34,139.535 203.213,139.535 203.58,139.902 217.323,139.902 v1(217.551,139.675)
  IC1 w0.15: v1(78.51,107.49) 78.944,107.056 78.944,103.352 78.842,103.25 78.842,99.72 81.356,97.206 81.356,93.269 81.153,93.066 81.153,91.008 81.813,90.348 81.813,87.274 v1(84.15,84.938)
  IC2 w0.15: v1@113.104,105.057 v1(113.106,105.054) 116.942,105.054 117.26,105.372 117.26,108.293 119.456,110.49 136.754,110.49 142.545,116.281 142.545,117.5 143.053,118.008 149.962,118.008 150.495,118.542 150.495,122.733 156.058,128.295 162.992,128.295 163.525,128.829 172.39,128.829 v1(183.084,139.523)
  IC3 w0.15: v1(113.106,105.054) 112.751,104.699 112.751,102.819 116.307,99.263 116.307,91.542 122.504,85.344 129.388,85.344 129.845,84.887 129.845,77.343 139.37,67.818 139.37,66.548 150.038,55.879 150.038,51.739 151.515,50.262 151.515,47.367 158.819,40.063 v1(160.223,40.063)
  FC4 w0.15: v1(78.51,107.49) 80.387,105.613 107.848,105.613 108.407,105.054 v1(113.106,105.054)
FCS_RESET: J11.32 R184.1 U42.36 U58.4 U72.11 | length 219.6
  FC1 w0.15: U58.4@77.85,112.44 77.85,111.863 v1(78.798,110.915) ; v1(184.216,138.572) 184.516,138.273 J11.32@186.358,138.273 ; v1(213.436,92.38) 214.224,93.167 214.224,109.906 215.951,111.633 215.951,122.301 220.853,127.203 220.853,132.74 ; U42.36@219.127,133.95 220.193,133.95 220.675,134.087 220.853,133.909 220.853,132.74 ; v1(221.488,133.375) 220.853,132.74
  FC2 w0.15: v1(184.201,138.963) 187.554,138.963 187.858,139.268 201.625,139.268 201.662,139.305 202.26,139.305 203.745,137.82 216.205,137.82 219.862,134.163 221.082,134.163 221.488,133.756 v1(221.488,133.375)
  FC4 w0.15: v1(78.798,110.915) 80.925,110.915 81.015,111.006 83.812,111.006 83.87,110.947 99.06,110.947 104.851,116.738 113.248,116.738 113.476,116.51 113.971,116.51 114.198,116.737 123.623,116.737 124.53,115.83 126.594,115.83 127.635,116.872 127.635,117.45 127.864,117.678 v1(170.332,117.678)
  BC3 w0.15: v1(170.332,117.678) 170.332,122.276 175.616,127.559 175.616,129.972 v1(184.216,138.572)
  BC1 w0.15: v1(184.201,138.963) 185.613,138.963 185.949,138.628 ; v1(184.216,138.572) 184.206,138.582 184.216,138.582 185.903,138.582 185.949,138.628 ; R184.1@186.51,138.09 186.487,138.09 185.949,138.628 ; v1(213.436,92.38) 213.651,92.165 U72.11@214.6,92.165
FDC_ACK#: J13.71 R136.1 U22.60 | length 47.4
  FC1 w0.15: U22.60@96.7,74.76 97.579,74.76 v1(97.79,74.549)
  FC4 w0.15: v1(63.965,62.357) 64.402,62.794 64.402,64.046 72.212,71.857 81.483,71.857 83.591,73.965 97.206,73.965 v1(97.79,74.549)
  BC1 w0.15: v1(63.965,62.357) 64.16,62.552 J13.71@65.207,62.552 ; R136.1@96.51,79.09 96.926,79.09 97.028,78.988 97.028,75.311 v1(97.79,74.549)
FDC_AUTOFD#: J13.73 R141.1 U22.74 | length 8.4
  FC1 w0.15: U22.74@96.7,81.81 97.92,81.81 98.247,81.483 97.63,81.476
  IC2 w0.15: 97.63,81.476 99.51,81.476 99.307,81.483
  BC1 w0.15: J13.73@65.207,60.952 67.034,60.952 67.384,61.303 v1(68.347,61.303) ; 99.307,81.483 99.51,81.686 R141.1@99.51,82.09
FDC_BUSY: J13.22 R143.2 U22.59 | length 35.6
  FC1 w0.15: 95.49,73.113 95.49,73.941 95.809,74.26 U22.59@96.7,74.26
  IC2 w0.15: v1(73.254,56.21) 77.241,56.21 84.766,63.735 89.084,63.735 89.967,64.618 89.967,67.869 90.322,67.945 95.49,73.113
  BC1 w0.15: J13.22@72.008,56.103 73.146,56.103 v1(73.254,56.21) ; 95.49,73.113 R143.2@95.49,74.09
FDC_CLK: R332.2 U22.18 | length 17.8
  FC1 w0.15: U22.18@81.5,73.76 82.675,73.76 83.287,74.371 83.287,78.537 83.871,79.121 83.871,81.28 82.652,82.499 82.652,85.141 v1(84.836,87.325)
  BC1 w0.15: R332.2@84.49,88.09 84.836,88.09 v1(84.836,87.325)
FDC_CTS1#: J8.8 R191.1 U22.80 | length 22.9
  FC1 w0.15: U22.80@93.15,83.86 93.15,84.938 93.658,85.446 v1(94.285,85.446) ; v1(99.49,75.49) R191.1@99.49,76.09 ; v1(105.512,76.2) J8.8@106.95,76.2
  FC2 w0.15: v1(99.49,75.49) 99.768,75.768 105.08,75.768 v1(105.512,76.2)
  IC3 w0.15: v1(94.285,85.446) 94.285,84.418 97.307,81.395 97.307,77.673 v1(99.49,75.49)
FDC_CTS2#: J13.82 R303.2 U22.90 | length 48.7
  FC1 w0.15: v1(81.229,69.139) 81.92,69.83 82.809,69.83 83.565,70.586 83.565,77.977 85.446,79.858 87.57,79.858 88.337,80.624 88.337,81.428 88.15,81.615 U22.90@88.15,83.86 88.15,84.785 88.51,85.145 R303.2@88.51,86.09
  IC4 w0.15: v1(66.802,53.703) 68.123,55.023 68.123,57.709 72.669,62.255 72.669,66.04 76.531,69.901 80.467,69.901 v1(81.229,69.139)
  BC1 w0.15: J13.82@65.207,53.703 v1(66.802,53.703)
FDC_DACK#: R118.1 U21.120 U22.34 | length 131.7
  FC1 w0.15: v1(86.947,67.564) 87.15,67.767 U22.34@87.15,68.66 ; v1(189.179,98.146) 189.182,98.143 U21.120@189.182,96.966
  FC4 w0.15: v1(86.947,67.564) 87.328,67.945 96.114,67.945 99.627,71.459 109.839,71.459 110.211,71.831 116.508,71.831 121.447,76.77 128.829,76.77 129.094,77.036 174.282,77.036 176.174,78.929 182.053,78.929 183.286,80.162 185.166,80.162 190.398,85.395 190.398,87.37 v1(195.51,92.481)
  BC4 w0.15: v1(189.179,98.146) 189.846,98.146 v1(195.51,92.481)
  BC1 w0.15: v1(195.51,92.481) R118.1@195.51,93.09
FDC_DCD1#: J8.4 R187.1 U22.83 | length 30
  FC1 w0.15: U22.83@91.65,83.86 91.65,81.095 92.253,80.493 93.878,80.493 94.311,80.925 94.311,82.08 94.691,82.461 95.135,82.461 95.733,83.058 99.876,83.058 100.076,82.858 100.076,74.224 102.21,72.09 R187.1@102.49,72.09 102.738,72.09 103.628,71.2 J8.4@106.95,71.2
FDC_DCD2#: J13.17 R309.2 U22.85 | length 49.9
  FC1 w0.15: U22.85@90.65,83.86 90.65,82.983 v1(90.853,82.78) ; v1(91.313,87.089) 91.51,86.892 R309.2@91.51,86.09
  FC3 w0.15: v1(90.853,82.78) 91.048,82.975 91.048,86.824 v1(91.313,87.089)
  BC1 w0.15: J13.17@72.008,52.103 73.66,52.103 75.456,53.899 78.08,53.899 78.638,54.458 78.638,58.928 79.248,59.538 82.677,59.538 83.287,60.147 83.287,70.358 88.739,75.811 88.739,78.579 91.084,80.924 91.084,82.549 v1(90.853,82.78)
FDC_DIR#: J13.7 U22.5 | length 54
  FC1 w0.15: U22.5@81.5,80.26 82.8,80.26 v1(83.312,80.772)
  FC3 w0.15: v1(70.256,80.289) 71.145,79.4 71.145,44.221 v1(70.815,43.891)
  FC4 w0.15: v1(70.256,80.289) 70.46,80.493 76.022,80.493 76.632,79.883 82.423,79.883 v1(83.312,80.772)
  BC1 w0.15: v1(70.815,43.891) 71.026,44.102 J13.7@72.058,44.102
FDC_DRATE0: R302.2 U22.17 U57.2 | length 11.9
  FC1 w0.15: U57.2@81.138,65.39 79.957,65.39 79.51,65.837 R302.2@79.51,69.09 79.51,73.709 80.061,74.26 U22.17@81.5,74.26
FDC_DRATE1: R306.2 U22.16 U57.12 | length 21.9
  FC1 w0.15: v1(80.416,74.76) U22.16@81.5,74.76 ; U57.12@86.863,64.74 88.108,64.74 ; v1(87.884,64.516) 88.108,64.74 ; R306.2@90.51,66.09 90.51,65.43 89.824,64.745 88.113,64.745 88.108,64.74
  IC1 w0.15: v1(80.416,74.76) 81.89,73.287 81.89,68.555 82.525,67.92 83.871,67.92 84.328,67.462 84.328,65.024 84.836,64.516 v1(87.884,64.516)
FDC_DS3: U21.123 U22.95 U69.1 | length 158.9
  FC1 w0.15: v1(85.447,82.067) 85.65,82.271 U22.95@85.65,83.86 ; U21.123@187.682,96.966 187.682,94.41 v1(188.29,93.802)
  IC1 w0.15: v1(188.29,93.802) 188.29,91.923 194.311,85.902 194.311,82.397 196.088,80.62 197.968,80.62 200.889,77.699 v1(200.889,62.89)
  FC4 w0.15: v1(85.447,82.067) 85.828,81.686 89.127,81.686 89.489,82.048 93.681,82.048 94.209,82.575 97.616,82.575 98.146,82.045 112.195,82.045 115.265,85.115 171.324,85.115 172.086,85.877 172.592,85.877 180.035,93.32 187.808,93.32 v1(188.29,93.802)
  BC1 w0.15: U69.1@200.7,57.065 199.577,57.065 199.034,57.607 199.034,61.036 v1(200.889,62.89)
FDC_DSKCHG#: J13.12 R122.2 U22.15 | length 34.1
  FC1 w0.15: v1(77.902,73.482) 78.232,73.482 78.51,73.76 R122.2@78.51,74.09 78.907,74.09 80.077,75.26 U22.15@81.5,75.26
  BC3 w0.15: 70.775,48.103 70.769,48.108 71.222,48.56 71.222,59.817 72.085,60.681 72.085,64.389 77.089,69.393 77.089,72.669 v1(77.902,73.482)
  BC1 w0.15: 70.775,48.103 J13.12@72.008,48.103
FDC_DSR1: J8.7 R189.1 U22.78 | length 6.5
  FC1 w0.15: v1(102.794,76.683) 102.616,76.683 102.49,76.69 ; v1(104.526,74.95) J8.7@106.95,74.95 ; 102.49,76.69 R189.1@102.49,76.09 102.612,76.664 102.49,76.69
  BC4 w0.15: v1(102.794,76.683) v1(104.526,74.95)
FDC_DSR2#: J13.84 R305.2 U22.88 | length 55.1
  FC1 w0.15: v1(84.303,75.413) 89.15,80.26 U22.88@89.15,83.86 89.15,86.214 89.51,86.574 R305.2@89.51,88.09
  IC4 w0.15: v1(67.208,52.103) 66.065,53.246 66.065,58.567 66.807,59.309 69.342,59.309 70.028,59.995 70.028,65.843 74.316,70.131 79.733,70.131 80.061,70.46 80.061,75.006 80.467,75.413 v1(84.303,75.413)
  BC1 w0.15: J13.84@65.207,52.103 v1(67.208,52.103)
FDC_DTR1#: R192.1 U22.81 U64.9 | length 34.3
  FC1 w0.15: v1(92.65,81.657) U22.81@92.65,83.86 ; R192.1@93.49,87.09 93.49,86.683 93.693,86.48 v1(93.896,86.48)
  FC3 w0.15: v1(92.65,81.657) 93.142,82.149 93.142,85.725 v1(93.896,86.48)
  FC4 w0.15: v1(92.65,81.657) 92.304,81.311 92.304,80.518 93.853,78.969 96.622,78.969 96.953,79.3 111.759,79.3 112.725,78.334 v1(112.725,76.79)
  BC1 w0.15: v1(112.725,76.79) U64.9@114.137,76.79
FDC_DTR2#: J13.20 U22.91 | length 45.3
  FC1 w0.15: U22.91@87.65,83.86 87.65,81.387 v1(87.96,81.077)
  BC1 w0.15: J13.20@72.008,54.503 70.917,54.503 70.714,54.706 70.714,55.53 70.009,56.235 70.009,58.02 70.891,58.903 76.81,58.903 76.911,59.004 76.911,64.618 78.283,65.989 79.934,65.989 82.855,68.91 82.855,69.647 82.22,70.282 82.22,73.355 83.363,74.498 83.363,78.029 83.998,78.664 87.376,78.664 87.96,79.248 v1(87.96,81.077)
FDC_ERROR#: J13.77 R142.1 U22.73 | length 51.6
  FC1 w0.15: v1(94.894,82.106) 95.69,81.31 U22.73@96.7,81.31
  IC4 w0.15: v1(63.957,57.752) 65.075,58.87 65.075,66.624 74.219,75.768 76.352,75.768 79.426,78.842 79.731,78.842 79.934,79.045 79.934,81.128 81.966,83.16 92.84,83.16 v1(93.51,82.49)
  BC4 w0.15: v1(93.51,82.49) 94.51,82.49 v1(94.894,82.106)
  BC1 w0.15: v1(63.957,57.752) J13.77@65.207,57.752 ; v1(93.51,82.49) R142.1@93.51,83.09
FDC_FDRQ: U21.115 U22.50 | length 116.5
  FC1 w0.15: v1(95.25,67.158) U22.50@95.25,68.66 ; U21.115@191.682,96.966 191.682,95.795 v1(192.024,95.453)
  IC2 w0.15: v1(95.25,67.158) 96.272,68.179 101.702,73.812 101.702,74.676 109.347,82.321 111.751,82.321 112.944,83.515 112.944,85.817 v1(115.011,87.884)
  FC4 w0.15: v1(115.011,87.884) 153.213,87.884 153.772,88.443 153.772,91.846 154.229,92.304 168.217,92.304 172.561,96.647 190.83,96.647 v1(192.024,95.453)
FDC_FINTR: U21.82 U22.38 | length 117.8
  FC1 w0.15: U22.38@89.2,68.66 89.2,67.594 v1(89.611,67.183) ; U21.82@196.732,81.991 v1(197.917,81.991)
  FC4 w0.15: v1(89.611,67.183) 89.992,66.803 95.605,66.803 95.985,67.183 98.261,67.183 102.306,71.229 110.441,71.229 110.79,71.577 117.036,71.577 121.999,76.54 129.059,76.54 129.324,76.806 173.214,76.806 173.417,76.603 174.587,76.603 175.029,77.045 177.939,77.045 179.121,78.228 181.91,78.228 183.566,79.883 195.809,79.883 v1(197.917,81.991)
FDC_HDCS0#: R366.2 U22.23 U68.1 | length 188
  FC1 w0.15: U22.23@81.5,71.26 82.804,71.26 v1(83.007,71.463)
  FC4 w0.15: v1(108.586,116.002) 111.126,116.002 111.404,116.28 114.071,116.28 114.289,116.499 123.247,116.499 124.145,115.6 126.946,115.6 127.17,115.824 176.952,115.824 177.557,116.429 182.113,116.429 192.278,126.594 220.145,126.594 220.932,127.381 v1(220.932,136.09)
  BC2 w0.15: v1(222.12,135.484) v1(223.563,134.04)
  BC3 w0.15: v1(83.007,71.463) 89.128,77.584 89.128,82.626 92.228,85.726 92.228,99.645 v1(108.586,116.002)
  BC1 w0.15: v1(220.932,136.09) R366.2@221.49,136.09 221.513,136.09 v1(222.12,135.484) ; v1(223.563,134.04) U68.1@224.862,134.04
FDC_HDCS1#: R367.2 U22.24 U68.2 | length 189
  FC1 w0.15: v1(80.416,72.238) 80.416,71.014 80.67,70.76 U22.24@81.5,70.76
  IC2 w0.15: v1(80.416,72.238) 80.62,72.441 83.414,72.441 91.364,80.392 93.015,80.392 93.457,80.833 93.812,80.833 94.64,81.661 95.707,81.661 99.517,85.471 99.517,87.605 99.974,88.062 103.2,88.062 103.886,88.748 114.884,88.748 118.618,92.481 136.55,92.481 137.008,92.939 137.008,104.75 147.752,115.494 177.419,115.494 181.254,119.329 185.894,119.329 187.376,120.811 188.57,120.811 194.352,126.594 217.536,126.594 v1(223.353,132.41)
  BC1 w0.15: R367.2@218.49,136.09 218.49,136.449 218.617,136.576 219.862,136.576 219.989,136.449 219.989,134.696 220.777,133.909 221.757,133.909 222.275,133.39 U68.2@224.333,133.39 ; v1(223.353,132.41) U68.2@224.333,133.39 ; U68.2@224.862,133.39 U68.2@224.333,133.39
FDC_HDSEL#: J13.11 U22.9 | length 38
  FC1 w0.15: U22.9@81.5,78.26 82.705,78.26 v1(82.88,78.435)
  BC3 w0.15: 73.246,47.303 73.254,47.295 73.254,48.844 74.905,50.495 74.905,53.162 78.334,56.591 78.334,64.719 80.874,67.26 80.874,70.714 83.083,72.923 83.083,78.232 v1(82.88,78.435)
  BC1 w0.15: J13.11@72.008,47.303 73.246,47.303
FDC_IDE7: J11.11 R369.2 U22.20 U42.13 | length 173.9
  FC1 w0.15: 80.478,72.76 U22.20@81.5,72.76 ; J11.11@186.358,124.973 v1(188.388,124.973) ; v1@188.443,124.973 188.567,125.096 206.794,125.096 206.871,125.019 210.845,125.019 211.352,125.527 U42.13@211.352,127.375
  IC4 w0.15: 80.478,72.76 80.416,72.822 81.102,72.822 83.109,70.815 83.109,69.596 83.312,69.393 87.528,69.393 88.011,69.875 88.011,70.937 91.14,74.066 92.481,74.066 95.098,76.683 95.098,76.937 97.536,79.375 105.359,79.375 107.899,81.915 111.481,81.915 114.376,84.811 117.297,84.811 125.095,92.608 135.484,92.608 147.599,104.724 160.122,104.724 160.655,105.258 160.655,117.45 161.214,118.008 170.129,118.008 177.093,124.973 v1(188.388,124.973) ; v1@188.392,124.968 v1(188.388,124.973) ; v1@188.443,124.973 v1(188.388,124.973)
  BC1 w0.15: R369.2@186.49,124.09 186.49,123.314 186.944,122.86 187.757,122.86 188.392,123.495 v1@188.392,124.968
FDC_INIT#: J13.72 R133.1 U22.72 | length 45.7
  FC1 w0.15: U22.72@96.7,80.81 97.536,80.81 v1(97.79,80.556)
  FC2 w0.15: v1(94.488,80.09) 94.954,80.556 v1(97.79,80.556)
  IC4 w0.15: v1(69.393,61.752) 69.393,66.015 71.661,68.283 71.661,70.34 75.286,73.965 78.283,73.965 81.382,77.064 86.995,77.064 87.915,77.984 87.915,78.13 89.236,79.451 v1(92.51,79.451)
  BC1 w0.15: J13.72@65.207,61.752 v1(69.393,61.752) ; v1(92.51,79.451) R133.1@92.51,80.09 v1(94.488,80.09)
FDC_IOW: U23.2 U35.58 | length 18.2
  FC1 w0.15: U35.58@190.62,31.15 v1(190.62,35.077)
  BC3 w0.15: v1(190.62,35.077) 194.843,39.301 v1(194.843,45.314)
  BC1 w0.15: U23.2@192.85,46.09 193.864,46.09 194.64,45.314 v1(194.843,45.314)
FDC_IRRX_RXD2: R315.1 U22.86 U26.3 U57.8 | length 42.3
  FC1 w0.15: v1(74.168,60.325) 74.583,60.74 U26.3@75.25,60.74 ; U57.8@86.863,62.14 v1(88.083,62.14) ; U22.86@90.15,83.86 90.15,83.032 90.455,82.727 90.455,81.548 v1(90.713,81.29)
  FC3 w0.15: v1(89.992,77.064) 89.992,80.569 v1(90.713,81.29)
  BC4 w0.15: v1(74.168,60.325) 74.955,61.112 83.287,61.112 84.314,62.14 v1(88.083,62.14)
  BC1 w0.15: v1(88.083,62.14) 86.589,63.635 86.589,68.656 88.621,70.688 88.621,75.159 89.992,76.53 v1(89.992,77.064) ; R315.1@90.51,82.09 90.51,81.493 v1(90.713,81.29)
FDC_IRTX_TXD2: R183.2 U22.87 U26.2 U57.5 | length 46.6
  FC1 w0.15: R183.2@66.51,59.09 66.929,59.09 v1(66.929,58.496) ; U26.2@75.25,61.39 75.997,61.39 76.13,61.523 76.13,61.593 v1(76.536,61.593) ; U57.5@81.138,63.44 v1(82.55,63.44) ; v1(84.785,70.333) 89.611,75.159 89.611,83.019 89.65,83.058 U22.87@89.65,83.86
  FC2 w0.15: v1(66.929,58.496) 70.46,62.027 76.103,62.027 v1(76.536,61.593) ; v1(82.55,63.44) 81.712,64.278 81.712,67.92 82.855,69.063 82.855,69.647 83.312,70.104 84.557,70.104 v1(84.785,70.333)
  FC4 w0.15: v1(76.536,61.593) 78.113,63.17 82.28,63.17 v1(82.55,63.44)
FDC_MTR2#: R310.1 U21.121 U22.94 | length 127.9
  FC1 w0.15: U22.94@86.15,83.86 86.15,86.462 ; v1(188.29,94.691) 188.682,95.083 U21.121@188.682,96.966
  FC2 w0.15: 86.15,86.462 86.15,86.665 87.776,88.29 91.084,88.29 92.735,89.941 97.409,89.941 99.792,92.324 99.792,93.543 100.431,94.183 115.493,94.183 116.307,94.996 119.558,94.996 120.269,94.285 120.269,92.354 120.193,92.278 120.193,91.846 120.396,91.643 121.92,91.643 125.095,94.818 143.002,94.818 144.348,93.472 145.821,93.472 146.736,94.386 151.917,94.386 152.425,94.894 167.742,94.894 168.377,94.259 180.924,94.259 181.297,94.632 188.231,94.632 v1(188.29,94.691)
  IC3 w0.15: v1(188.29,94.691) 189.56,95.961 194.056,95.961 194.352,95.665 194.352,95.301 194.628,95.025 196.04,95.025 v1(196.723,95.707)
  BC1 w0.15: R310.1@196.51,95.09 196.51,95.494 v1(196.723,95.707)
FDC_MTR3#: U21.117 U22.97 | length 118
  FC1 w0.15: U22.97@84.65,83.86 84.65,82.863 v1(85.09,82.423) ; v1(190.678,94.361) 190.682,94.365 U21.117@190.682,96.966
  FC4 w0.15: v1(85.09,82.423) 88.418,82.423 88.595,82.6 89.197,82.6 89.519,82.278 91.165,82.278 91.742,82.855 97.815,82.855 98.349,82.321 105.232,82.321 106.07,83.16 109.271,83.16 113.296,87.185 167.499,87.185 171.856,91.542 171.856,93.32 172.796,94.259 179.984,94.259 181.915,96.19 188.849,96.19 v1(190.678,94.361)
FDC_PD0: J13.30 U22.69 | length 34.5
  FC1 w0.15: v1(94.488,79.426) 94.604,79.31 U22.69@96.7,79.31
  IC2 w0.15: 73.348,62.502 73.355,62.509 73.609,62.255 73.609,61.342 73.762,61.19 75.033,61.19 76.911,63.068 79.908,63.068 85.166,68.326 85.166,69.901 85.573,70.307 85.725,70.307 94.488,79.07 v1(94.488,79.426)
  BC1 w0.15: J13.30@72.008,62.502 73.348,62.502
FDC_PD1: J13.29 U22.68 | length 35.1
  FC1 w0.15: U22.68@96.7,78.81 97.894,78.81 v1(97.9,78.816)
  IC4 w0.15: v1(73.254,61.493) 76.911,65.151 79.045,65.151 82.956,69.063 87.528,69.063 88.29,69.825 88.29,70.891 91.059,73.66 92.927,73.66 97.9,78.633 v1(97.9,78.816)
  BC1 w0.15: J13.29@72.008,61.702 73.045,61.702 v1(73.254,61.493)
FDC_PD2: J13.28 U22.67 | length 34.5
  FC1 w0.15: v1(93.37,78.511) 93.498,78.384 95.887,78.384 95.961,78.31 U22.67@96.7,78.31
  IC2 w0.15: v1(74.016,61.57) 74.067,61.57 77.446,64.948 81.247,64.948 84.277,67.979 84.277,72.217 90.572,78.511 v1(93.37,78.511)
  BC1 w0.15: J13.28@72.008,60.952 73.398,60.952 v1(74.016,61.57)
FDC_PD3: J13.27 U22.66 | length 38.5
  FC1 w0.15: U22.66@96.7,77.81 97.901,77.81 v1(98.704,78.613)
  IC2 w0.15: v1(73.832,60.706) 79.808,60.706 81.8,62.698 82.815,62.698 87.302,67.185 87.302,68.176 88.367,69.24 89.814,69.24 91.187,70.613 91.187,72.695 96.902,78.41 98.501,78.41 v1(98.704,78.613)
  BC1 w0.15: J13.27@72.008,60.102 73.228,60.102 v1(73.832,60.706)
FDC_PD4: J13.26 U22.64 | length 37.2
  FC1 w0.15: U22.64@96.7,76.81 97.536,76.81 98.12,77.394
  IC4 w0.15: 73.247,59.302 73.254,59.309 76.606,59.309 77.038,59.741 77.038,62.332 83.312,68.605 88.113,68.605 89.052,69.545 89.052,70.053 89.941,70.942 90.653,70.942 97.18,77.47 98.12,77.47 98.12,77.394
  BC1 w0.15: J13.26@72.008,59.302 73.247,59.302
FDC_PD5: J13.25 U22.63 | length 38.7
  FC1 w0.15: U22.63@96.7,76.31 97.561,76.31 97.782,76.53 98.171,76.53 98.704,75.997 v1(98.704,74.143)
  IC4 w0.15: v1(73.26,58.502) 77.717,58.502 81.913,62.698 82.536,62.698 86.487,66.65 86.487,67.869 86.919,68.301 90.348,68.301 92.126,70.079 92.126,71.222 92.507,71.603 94.259,71.603 95.275,72.619 97.18,72.619 v1(98.704,74.143)
  BC1 w0.15: J13.25@72.008,58.502 v1(73.26,58.502)
FDC_PD6: J13.76 U22.62 | length 48.9
  FC1 w0.15: U22.62@96.7,75.81 97.596,75.81 v1(97.917,75.489)
  IC2 w0.15: v1(63.957,59.106) 67.138,59.106 70.388,55.855 77.267,55.855 84.917,63.505 90.048,63.505 90.861,64.318 90.861,67.889 96.52,73.548 96.52,74.092 v1(97.917,75.489)
  BC1 w0.15: v1(63.957,59.106) 63.957,58.725 64.18,58.502 J13.76@65.207,58.502
FDC_PD7: J13.24 U22.61 | length 33.1
  FC1 w0.15: v1(95.606,75.26) U22.61@96.7,75.26
  IC2 w0.15: v1(76.048,57.703) 78.378,57.703 87.532,66.856 87.532,67.462 87.737,67.668 89.386,67.668 91.577,69.859 91.577,71.232 v1(95.606,75.26)
  BC1 w0.15: J13.24@72.008,57.703 v1(76.048,57.703)